# Altium PCB ResistorDecadeBox.PcbDoc
Units mm, origin at the board's own origin, x right, y up, seen from the top; angles counter-clockwise.
Board outline 242.25 x 69.25 mm, 2 copper layers (Top Layer, Bottom Layer); 60 components, 61 nets, 188 pads, 0 vias.
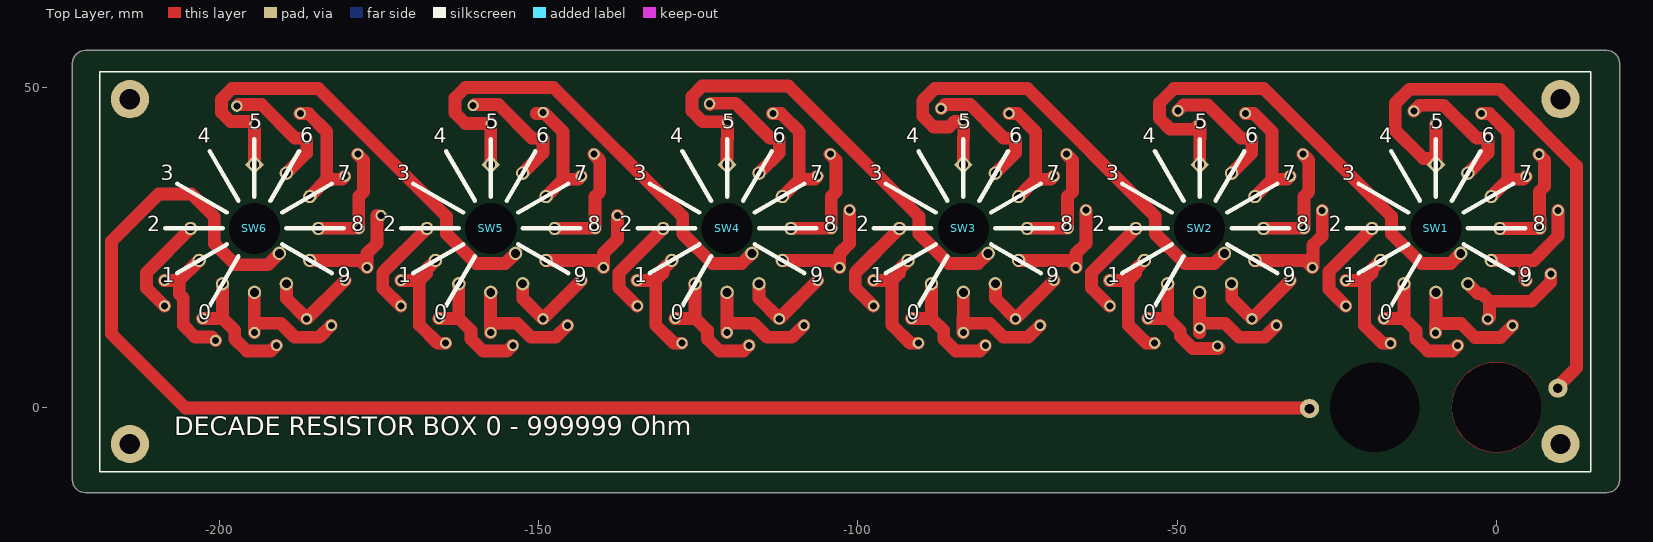
[diagram p0: Top Layer view]
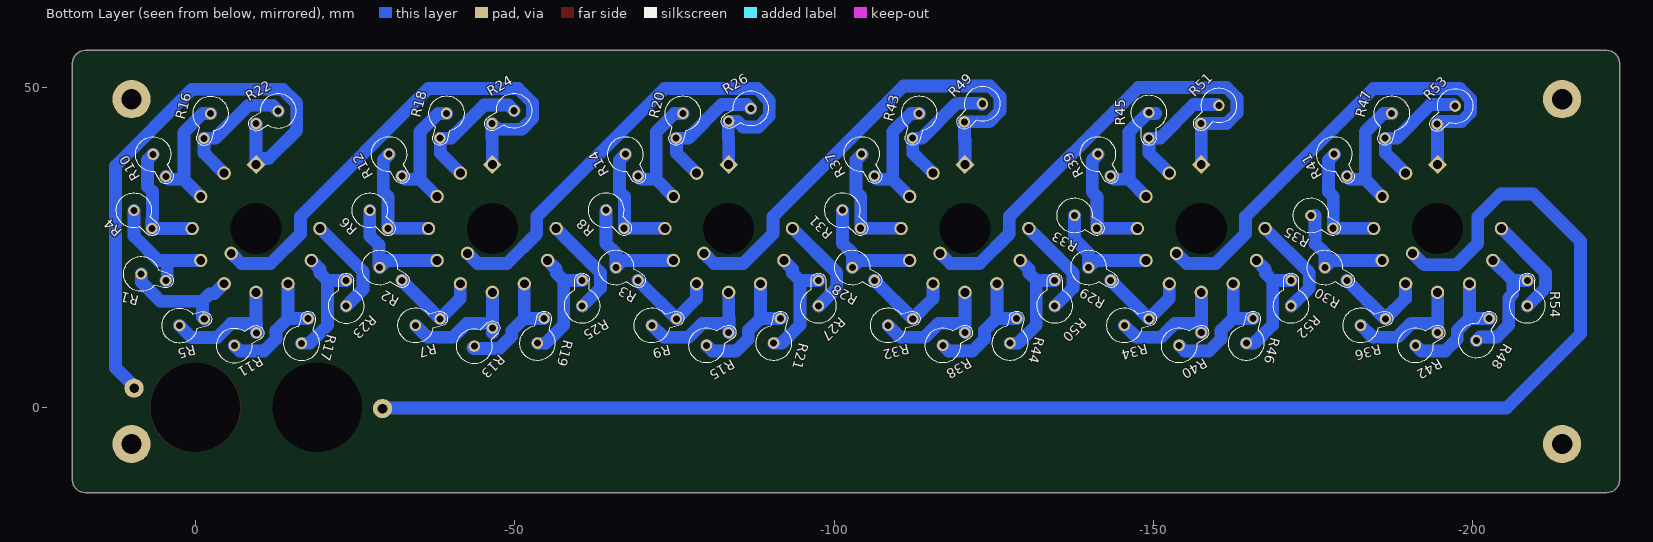
[diagram p1: Bottom Layer view, seen from below]

## Layer stack, top to bottom
Top Solder: solder mask 0.0102, Solder Resist, Dk 3.5
Top Layer: signal copper 0.0356
Dielectric 1: dielectric 0.32, FR-4, Dk 4.8
Bottom Layer: signal copper 0.0356
Bottom Solder: solder mask 0.0102, Solder Resist, Dk 3.5

## Board outline
-222.848,-12.14 -222.663,-12.486 -222.414,-12.789 -222.111,-13.038 -221.765,-13.223 -221.39,-13.337 -221,-13.375 17.25,-13.375 17.64,-13.337 18.015,-13.223 18.361,-13.038 18.664,-12.789 18.913,-12.486 19.098,-12.14 19.212,-11.765 19.25,-11.375 19.25,53.875 19.212,54.265 19.098,54.64 18.913,54.986 18.664,55.289 18.361,55.538 18.015,55.723 17.64,55.837 17.25,55.875 -221,55.875 -221.39,55.837 -221.765,55.723 -222.111,55.538 -222.414,55.289 -222.663,54.986 -222.848,54.64 -222.962,54.265 -223,53.875 -223,-11.375 -222.962,-11.765

## Design rules (kind name [scope] priority, off if disabled: settings)
Clearance [All] p1: gap=0.5 ignorepadtopadclearanceinfootprint=FALSE
PolygonConnect [All] p1: connectstyle=Relief reliefconductorwidth=0.254 reliefentries=4 polygonreliefangle="90 Angle" airgapwidth=0.254
RoutingVias [All] p1: holewidth=0.711 width=1.27 viastyle="Through Hole" minholewidth=0.711 minwidth=1.27 maxholewidth=0.711 maxwidth=1.27
SolderMaskExpansion [All] p1: expansion=0.102 istentingtop=FALSE
Width [All] p1: maxlimit=5 minlimit=0.254 preferedwidth=0.254 minimp=50.000000 maximp=50.000000 favimp=50.000000
30 further rules are at their usual default settings.

## Components (designator, comment, footprint, x,y, rotation, side; value= is the part's Value field where it differs from the comment)
R1 "GENERIC-RES" RES-YAGEO-FMP300-VERT 8.482,20.884 r195 bottom
R2 "GENERIC-RES" RES-YAGEO-FMP300-VERT -28.857,21.884 r210 bottom
R3 "GENERIC-RES" RES-YAGEO-FMP300-VERT -65.857,21.884 r210 bottom
R4 "GENERIC-RES" RES-YAGEO-FMP300-VERT 9.63,30.828 r225 bottom
R5 "GENERIC-RES" RES-YAGEO-FMP300-VERT 2.477,12.791 r165 bottom
R6 "GENERIC-RES" RES-YAGEO-FMP300-VERT -27.309,30.828 r225 bottom
R7 "GENERIC-RES" RES-YAGEO-FMP300-VERT -34.462,12.826 r165 bottom
R8 "GENERIC-RES" RES-YAGEO-FMP300-VERT -64.309,30.863 r225 bottom
R9 "GENERIC-RES" RES-YAGEO-FMP300-VERT -71.462,12.826 r165 bottom
R10 "GENERIC-RES" RES-YAGEO-FMP300-VERT 6.618,39.615 r240 bottom
R11 "GENERIC-RES" RES-YAGEO-FMP300-VERT -6.097,9.665 r150 bottom
R12 "GENERIC-RES" RES-YAGEO-FMP300-VERT -30.321,39.65 r240 bottom
R13 "GENERIC-RES" RES-YAGEO-FMP300-VERT -43.672,9.572 r135 bottom
R14 "GENERIC-RES" RES-YAGEO-FMP300-VERT -67.321,39.65 r240 bottom
R15 "GENERIC-RES" RES-YAGEO-FMP300-VERT -80.036,9.7 r150 bottom
R16 "GENERIC-RES" RES-YAGEO-FMP300-VERT -2.384,45.982 r285 bottom
R17 "GENERIC-RES" RES-YAGEO-FMP300-VERT -16.616,10.018 r105 bottom
R18 "GENERIC-RES" RES-YAGEO-FMP300-VERT -39.324,46.017 r285 bottom
R19 "GENERIC-RES" RES-YAGEO-FMP300-VERT -53.555,10.053 r105 bottom
R20 "GENERIC-RES" RES-YAGEO-FMP300-VERT -76.324,46.017 r285 bottom
R21 "GENERIC-RES" RES-YAGEO-FMP300-VERT -90.555,10.053 r105 bottom
R22 "GENERIC-RES" RES-YAGEO-FMP300-VERT -12.964,46.4 r330 bottom
R23 "GENERIC-RES" RES-YAGEO-FMP300-VERT -23.618,15.849 r90 bottom
R24 "GENERIC-RES" RES-YAGEO-FMP300-VERT -49.903,46.435 r330 bottom
R25 "GENERIC-RES" RES-YAGEO-FMP300-VERT -60.557,15.884 r90 bottom
R26 "GENERIC-RES" RES-YAGEO-FMP300-VERT -86.964,46.8 r330 bottom
R27 "GENERIC-RES" RES-YAGEO-FMP300-VERT -97.557,15.884 r90 bottom
R28 "GENERIC-RES" RES-YAGEO-FMP300-VERT -102.857,21.884 r210 bottom
R29 "GENERIC-RES" RES-YAGEO-FMP300-VERT -139.857,21.884 r210 bottom
R30 "GENERIC-RES" RES-YAGEO-FMP300-VERT -176.857,21.884 r210 bottom
R31 "GENERIC-RES" RES-YAGEO-FMP300-VERT -101.309,30.863 r225 bottom
R32 "GENERIC-RES" RES-YAGEO-FMP300-VERT -108.462,12.826 r165 bottom
R33 "GENERIC-RES" RES-YAGEO-FMP300-VERT -137.673,30.035 r210 bottom
R34 "GENERIC-RES" RES-YAGEO-FMP300-VERT -145.463,12.826 r165 bottom
R35 "GENERIC-RES" RES-YAGEO-FMP300-VERT -174.673,30.035 r210 bottom
R36 "GENERIC-RES" RES-YAGEO-FMP300-VERT -182.462,12.826 r165 bottom
R37 "GENERIC-RES" RES-YAGEO-FMP300-VERT -104.321,39.65 r240 bottom
R38 "GENERIC-RES" RES-YAGEO-FMP300-VERT -117.036,9.7 r150 bottom
R39 "GENERIC-RES" RES-YAGEO-FMP300-VERT -141.321,39.65 r240 bottom
R40 "GENERIC-RES" RES-YAGEO-FMP300-VERT -154.036,9.7 r150 bottom
R41 "GENERIC-RES" RES-YAGEO-FMP300-VERT -178.321,39.65 r240 bottom
R42 "GENERIC-RES" RES-YAGEO-FMP300-VERT -191.036,9.7 r150 bottom
R43 "GENERIC-RES" RES-YAGEO-FMP300-VERT -113.324,46.017 r285 bottom
R44 "GENERIC-RES" RES-YAGEO-FMP300-VERT -127.555,10.053 r105 bottom
R45 "GENERIC-RES" RES-YAGEO-FMP300-VERT -149.288,46.153 r270 bottom
R46 "GENERIC-RES" RES-YAGEO-FMP300-VERT -164.555,10.053 r105 bottom
R47 "GENERIC-RES" RES-YAGEO-FMP300-VERT -187.324,46.017 r285 bottom
R48 "GENERIC-RES" RES-YAGEO-FMP300-VERT -200.59,10.453 r120 bottom
R49 "GENERIC-RES" RES-YAGEO-FMP300-VERT -123.228,47.528 r315 bottom
R50 "GENERIC-RES" RES-YAGEO-FMP300-VERT -134.557,15.884 r90 bottom
R51 "GENERIC-RES" RES-YAGEO-FMP300-VERT -160.268,47.263 r315 bottom
R52 "GENERIC-RES" RES-YAGEO-FMP300-VERT -171.557,15.884 r90 bottom
R53 "GENERIC-RES" RES-YAGEO-FMP300-VERT -197.268,47.165 r315 bottom
R54 "GENERIC-RES" RES-YAGEO-FMP300-VERT -208.557,15.884 r90 bottom
SW1 "SWITCH-ROTARY-1X10" SWITCH-ALPHA-SR2513F-0110 -9.5,28 r225 top locked
SW2 "SWITCH-ROTARY-1X10" SWITCH-ALPHA-SR2513F-0110 -46.5,28 r225 top locked
SW3 "SWITCH-ROTARY-1X10" SWITCH-ALPHA-SR2513F-0110 -83.5,28 r225 top locked
SW4 "SWITCH-ROTARY-1X10" SWITCH-ALPHA-SR2513F-0110 -120.5,28 r225 top locked
SW5 "SWITCH-ROTARY-1X10" SWITCH-ALPHA-SR2513F-0110 -157.5,28 r225 top locked
SW6 "SWITCH-ROTARY-1X10" SWITCH-ALPHA-SR2513F-0110 -194.5,28 r225 top locked

## Footprints (in the part's own frame and the unit in brackets; to place one, negate y for a bottom-side part, rotate by r counter-clockwise, add the part's x,y. Pads: shape width x height; smd on the part's side, far side on the other; paste and mask are expansions set on the pad)
RES-YAGEO-FMP300-VERT [mm] "YAGEO FMP300, 3W, 4mm Pitch, 6mm Body Dia, VERTICAL"
  round 1.8 hole 1.1 paste-2539.97 mask-1: 1(0,0) 2(4,0)
  silkscreen extent -2.75,-2.75 5.15,2.75, body extent -2.75,-2.74 2.75,2.74, height 18.51
SWITCH-ALPHA-SR2513F-0110 [mm]
  rect 2.1x2.1 hole 1.4: 1(-7.071,-7.071)
  round 2.1 hole 1.4: 2(-9.659,-2.588) 3(-9.659,2.588) 4(-7.071,7.071) 5(-2.588,9.659) 6(2.588,9.659) 7(7.071,7.071) 8(9.659,2.588) 9(9.659,-2.588) 10(7.071,-7.071) C(0,5.5)
  round 0 hole 8 unplated paste-2539.97 mask-1: ME1(0,0)

## Free pads (board coordinates)
  round 6 hole 3.2 paste-2539.97 mask-1: 11(-214,48.25) 12(-214,-5.75) 13(10,48.25) 14(10,-5.75)
  round 3 hole 1.5 paste-2539.97 mask-1: 15(9.6,3) 16(-29.3,-0.2)
  round 0 hole 14 paste-2539.97 mask-1: ME1(0,0) ME2(-19.05,0)

## Nets (pads, with @x,y where several pads share a name; then routed paths per layer and width w, separated by ;. In a path a pad name is that pad's centre, name@x,y a point inside that pad or via, vN(x,y) a via of type N, cw(c..) or ccw(c..) an arc to the next point about the centre after c; other vN are vias at no path point)
NetJ1_1: pad.15 R22.2 SW1.1
NetJ2_1: pad.16 SW6.C
NetR1_1: R1.1 R5.2 SW1.6
NetR1_2: R1.2 R4.1 SW1.5
NetR2_1: R2.1 R6.1 SW2.5
NetR2_2: R2.2 R7.2 SW2.6
NetR3_1: R3.1 R8.1 SW3.5
NetR3_2: R3.2 R9.2 SW3.6
NetR4_2: R4.2 R10.1 SW1.4
NetR5_1: R5.1 R11.2 SW1.7
NetR6_2: R6.2 R12.1 SW2.4
NetR7_1: R7.1 R13.2 SW2.7
NetR8_2: R8.2 R14.1 SW3.4
NetR9_1: R9.1 R15.2 SW3.7
NetR10_2: R10.2 R16.1 SW1.3
NetR11_1: R11.1 R17.2 SW1.8
NetR12_2: R12.2 R18.1 SW2.3
NetR13_1: R13.1 R19.2 SW2.8
NetR14_2: R14.2 R20.1 SW3.3
NetR15_1: R15.1 R21.2 SW3.8
NetR16_2: R16.2 R22.1 SW1.2
NetR17_1: R17.1 R23.2 SW1.9
NetR18_2: R18.2 R24.1 SW2.2
NetR19_1: R19.1 R25.2 SW2.9
NetR20_2: R20.2 R26.1 SW3.2
NetR21_1: R21.1 R27.2 SW3.9
NetR23_1: R23.1 SW1.10
NetR24_2: R24.2 SW1.C SW2.1
NetR25_1: R25.1 SW2.10
NetR26_2: R26.2 SW2.C SW3.1
NetR27_1: R27.1 SW3.10
NetR28_1: R28.1 R31.1 SW4.5
NetR28_2: R28.2 R32.2 SW4.6
NetR29_1: R29.1 R33.1 SW5.5
NetR29_2: R29.2 R34.2 SW5.6
NetR30_1: R30.1 R35.1 SW6.5
NetR30_2: R30.2 R36.2 SW6.6
NetR31_2: R31.2 R37.1 SW4.4
NetR32_1: R32.1 R38.2 SW4.7
NetR33_2: R33.2 R39.1 SW5.4
NetR34_1: R34.1 R40.2 SW5.7
NetR35_2: R35.2 R41.1 SW6.4
NetR36_1: R36.1 R42.2 SW6.7
NetR37_2: R37.2 R43.1 SW4.3
NetR38_1: R38.1 R44.2 SW4.8
NetR39_2: R39.2 R45.1 SW5.3
NetR40_1: R40.1 R46.2 SW5.8
NetR41_2: R41.2 R47.1 SW6.3
NetR42_1: R42.1 R48.2 SW6.8
NetR43_2: R43.2 R49.1 SW4.2
NetR44_1: R44.1 R50.2 SW4.9
NetR45_2: R45.2 R51.1 SW5.2
NetR46_1: R46.1 R52.2 SW5.9
NetR47_2: R47.2 R53.1 SW6.2
NetR48_1: R48.1 R54.2 SW6.9
NetR49_2: R49.2 SW3.C SW4.1
NetR50_1: R50.1 SW4.10
NetR51_2: R51.2 SW4.C SW5.1
NetR52_1: R52.1 SW5.10
NetR53_2: R53.2 SW5.C SW6.1
NetR54_1: R54.1 SW6.10
pads on no net: SW1.ME1 SW2.ME1 SW3.ME1 SW4.ME1 SW5.ME1 SW6.ME1
copper on no net: | length 44
  Top Layer w0.05: 7,0 ccw(c0,0) 7,0

## Other copper
Multi-Layer:
  lines w2 net NetJ1_1: 9.173,2.773 9.173,2.844 12.53,6.201 12.53,37.804 0.534,49.8 -13.665,49.8 -15.864,47.601 -15.864,43.364 -11.45,38.95 -10.52,38.95 -9.571,38 -9.5,38 -9.5,44.4 ; -9.5,44.4 -9.5,44.4
  lines w2 net NetJ2_1: -190.592,24.13 -192.403,22.319 -197.481,22.319 -200.781,25.619 -200.781,29.8 -204.381,33.4 -209.5,33.4 -216.9,26 -216.9,11.5 -205.3,-0.1 -29.8,-0.1
  lines w2 net NetR10_2: -2.384,45.982 -1.112,45.982 1.8,43.07 1.8,35.64 -0.84,33 ; 1.8,35.7 4.167,35.7 4.618,36.151
  lines w2 net NetR11_1: -17.651,13.882 -14.482,13.882 ; -14.5,19.34 -14.5,13.9 -14.482,13.882 ; -6.097,9.665 -6.936,8.826 -10.737,8.826 -12.609,10.699 -12.609,12.009 -14.482,13.882
  lines w2 net NetR12_2: -39.365,46.001 -38.035,46.001 -35.181,43.147 -35.181,35.659 -37.821,33.019 ; -35.181,35.719 -32.814,35.719 -32.363,36.17
  lines w2 net NetR13_1: -54.632,13.901 -51.463,13.901 ; -51.481,19.359 -51.5,19.34 -51.5,13.938 -51.463,13.901 ; -43.431,9.331 -43.578,9.184 -47.577,9.184 -49.52,11.127 -49.52,11.958 -51.463,13.901
  lines w2 net NetR14_2: -76.365,46.001 -75.035,46.001 -72.181,43.147 -72.181,35.659 -74.821,33.019 ; -72.181,35.719 -69.814,35.719 -69.363,36.17
  lines w2 net NetR15_1: -91.632,13.901 -88.463,13.901 ; -88.481,19.359 -88.5,19.34 -88.5,13.938 -88.463,13.901 ; -80.078,9.684 -80.943,8.819 -84.693,8.819 -86.578,10.704 -86.578,12.016 -88.463,13.901
  lines w2 net NetR16_2: -12.964,46.4 -12.064,47.3 -8.299,47.3 -3.117,42.118 -1.349,42.118 -1.349,39.811 -4.5,36.66
  lines w2 net NetR17_1: -23.618,19.849 -20.7,19.849 -19.528,21.021 -19.528,21.605 -18.16,22.973 -18.16,23 ; -20.7,19.34 -20.7,12.83 -17.889,10.018 -16.616,10.018
  lines w2 net NetR18_2: -49.945,46.419 -49.029,47.335 -45.238,47.335 -40.04,42.137 -38.33,42.137 -38.33,39.83 -41.481,36.679
  lines w2 net NetR19_1: -60.599,19.868 -57.681,19.868 -56.509,21.04 -56.509,21.624 -55.141,22.992 -55.141,23.019 ; -57.681,19.359 -57.681,12.907 -54.812,10.038 -53.597,10.038
  lines w2 net NetR1_1: -4.5,19.34 -4.473,19.34 -2.926,17.792 -2.288,17.792 -1.117,16.621 ; -1.387,13.826 -1.117,14.097 -1.117,16.621 ; 8.482,20.884 8.482,19.611 5.491,16.621 -1.117,16.621
  lines w2 net NetR1_2: -0.84,23 5.802,23 9.63,26.828 9.63,30.828 ; 4.4,23 4.4,20.067 4.618,19.849
  lines w2 net NetR20_2: -86.964,46.8 -86.364,47.4 -82.423,47.4 -77.16,42.137 -75.33,42.137 -75.33,39.83 -78.481,36.679
  lines w2 net NetR21_1: -97.599,19.868 -94.681,19.868 -93.509,21.04 -93.509,21.624 -92.141,22.992 -92.141,23.019 ; -94.681,19.359 -94.681,12.907 -91.812,10.038 -90.597,10.038
  lines w2 net NetR23_1: -23.618,15.849 -26.241,18.472 -26.241,21.259 -19.519,27.981
  lines w2 net NetR24_2: -46.5,38 -46.5,42.048 -46.439,42.108 -46.439,44.435 -47.339,43.535 -51.105,43.535 -52.803,45.234 -52.803,47.636 -50.54,49.9 -36.47,49.9 -16.45,29.88 -16.45,27.172 -11.778,22.5 -7.222,22.5 -5.611,24.111
  lines w2 net NetR25_1: -60.599,15.868 -63.426,18.696 -63.426,21.074 -56.5,28
  lines w2 net NetR26_2: -83.5,38 -83.5,42.071 -83.439,42.132 -83.439,44.435 ; -83.5,44.8 -84.863,44.8 -85.763,43.9 -88.165,43.9 -89.864,45.599 -89.864,48.001 -87.965,49.9 -73.47,49.9 -53.45,29.88 -53.45,27.172 -48.778,22.5 -44.222,22.5 -42.592,24.13
  lines w2 net NetR27_1: -97.599,15.868 -100.426,18.696 -100.426,21.074 -93.5,28
  lines w2 net NetR28_1: -111.84,23 -103.973,23 -102.857,21.884 -102.857,24.116 -101.309,25.664 -101.309,30.828
  lines w2 net NetR28_2: -115.5,19.34 -115.481,19.321 -115.481,17.016 -112.326,13.861 -106.321,19.866 -106.321,19.884
  lines w2 net NetR29_1: -148.84,23 -140.973,23 -139.857,21.884 -139.857,24.116 -137.673,26.3 -137.673,30.035
  lines w2 net NetR29_2: -152.5,19.34 -152.481,19.321 -152.481,17.016 -149.326,13.861 -143.321,19.866 -143.321,19.884
  lines w2 net NetR2_1: -37.84,23 -29.973,23 -28.857,21.884 -28.738,22.004 -28.738,25.4 -27.309,26.828 -27.309,30.828
  lines w2 net NetR2_2: -41.5,19.34 -41.481,19.321 -41.481,17.016 -38.326,13.861 -32.321,19.866 -32.321,19.884
  lines w2 net NetR30_1: -185.84,23 -177.973,23 -176.857,21.884 -176.857,24.116 -175.309,25.664 -175.309,30.035
  lines w2 net NetR30_2: -189.5,19.34 -189.481,19.321 -189.481,17.016 -186.326,13.861 -180.321,19.866 -180.321,19.884
  lines w2 net NetR31_2: -110.481,28.019 -104.179,28.019 ; -104.363,39.634 -103.421,38.692 -103.421,33.746 -104.179,32.988 -104.179,28.042
  lines w2 net NetR32_1: -120.542,11.684 -120.542,13.158 ; -120.481,17.992 -120.519,17.954 -120.519,14.123 -120.542,14.1 -120.542,13.158 ; -108.504,12.81 -110.353,10.961 -114.196,10.961 -116.393,13.158 -120.542,13.158
  lines w2 net NetR33_2: -147.481,28.019 -141.179,28.019 ; -141.363,39.634 -140.421,38.693 -140.421,33.746 -141.179,32.988 -141.179,28.042
  lines w2 net NetR34_1: -157.542,11.684 -157.542,13.158 ; -157.481,17.992 -157.519,17.954 -157.519,14.123 -157.542,14.1 -157.542,13.158 ; -145.504,12.81 -147.353,10.961 -151.196,10.961 -153.393,13.158 -157.542,13.158
  lines w2 net NetR35_2: -184.481,28.019 -178.179,28.019 ; -178.363,39.634 -177.421,38.692 -177.421,33.746 -178.179,32.988 -178.179,28.042
  lines w2 net NetR36_1: -194.542,11.684 -194.542,13.158 ; -194.481,17.992 -194.519,17.954 -194.519,14.123 -194.542,14.1 -194.542,13.158 ; -182.504,12.81 -184.353,10.961 -188.196,10.961 -190.393,13.158 -194.542,13.158
  lines w2 net NetR37_2: -113.365,46.001 -112.035,46.001 -109.181,43.147 -109.181,35.659 -111.821,33.019 ; -109.181,35.719 -106.814,35.719 -106.363,36.17
  lines w2 net NetR38_1: -128.632,13.901 -125.463,13.901 ; -125.481,19.359 -125.5,19.34 -125.5,13.938 -125.463,13.901 ; -117.078,9.684 -117.943,8.819 -121.693,8.819 -123.578,10.704 -123.578,12.016 -125.463,13.901
  lines w2 net NetR39_2: -150.365,46.001 -149.035,46.001 -146.181,43.147 -146.181,35.659 -148.821,33.019 ; -146.181,35.719 -143.814,35.719 -143.363,36.17
  lines w2 net NetR3_1: -74.84,23 -66.973,23 -65.857,21.884 -65.857,24.116 -64.309,25.664 -64.309,30.828
  lines w2 net NetR3_2: -78.5,19.34 -78.481,19.321 -78.481,17.016 -75.326,13.861 -69.321,19.866 -69.321,19.884
  lines w2 net NetR40_1: -165.632,13.901 -162.463,13.901 ; -162.481,19.359 -162.5,19.34 -162.5,13.938 -162.463,13.901 ; -154.078,9.684 -154.942,8.819 -158.693,8.819 -160.578,10.704 -160.578,12.016 -162.463,13.901
  lines w2 net NetR41_2: -187.365,46.001 -186.035,46.001 -183.181,43.147 -183.181,35.659 -185.821,33.019 ; -183.181,35.719 -180.814,35.719 -180.363,36.17
  lines w2 net NetR42_1: -202.632,13.901 -199.463,13.901 ; -199.481,19.359 -199.5,19.34 -199.5,13.938 -199.463,13.901 ; -191.078,9.684 -191.943,8.819 -195.693,8.819 -197.578,10.704 -197.578,12.016 -199.463,13.901
  lines w2 net NetR43_2: -123.132,47.432 -122.964,47.6 -119.199,47.6 -113.736,42.137 -112.33,42.137 -112.33,39.83 -115.481,36.679
  lines w2 net NetR44_1: -134.599,19.868 -131.681,19.868 -130.509,21.04 -130.509,21.624 -129.141,22.992 -129.141,23.019 ; -131.681,19.359 -131.681,12.907 -128.812,10.038 -127.597,10.038
  lines w2 net NetR45_2: -159.964,47.4 -156.303,47.4 -151.04,42.137 -149.33,42.137 -149.33,39.83 -152.481,36.679
  lines w2 net NetR46_1: -171.599,19.868 -168.681,19.868 -167.509,21.04 -167.509,21.624 -166.141,22.992 -166.141,23.019 ; -168.681,19.359 -168.681,12.906 -165.812,10.038 -164.597,10.038
  lines w2 net NetR47_2: -196.964,47.4 -193.401,47.4 -188.138,42.137 -186.33,42.137 -186.33,39.83 -189.481,36.679
  lines w2 net NetR48_1: -208.599,19.868 -206.292,19.868 ; -203.141,23.019 -206.292,19.868 ; -200.59,10.453 -201.154,11.017 -203.791,11.017 -205.657,12.883 -205.657,17.085 -206.292,17.72 -206.292,19.868
  lines w2 net NetR49_2: -120.5,38 -120.5,41.885 -120.439,41.946 -120.439,44.435 ; -120.4,44.7 -124.32,44.7 -126,46.38 -126,48.676 -124.376,50.3 -110.87,50.3 -90.45,29.88 -90.45,27.172 -85.778,22.5 -81.222,22.5 -79.592,24.13
  lines w2 net NetR4_2: 0.5,28 0.5,28 6.802,28 6.802,29.556 6.73,29.627 6.73,33.777 7.518,34.565 7.518,38.715 6.618,39.615
  lines w2 net NetR50_1: -134.599,15.868 -137.426,18.696 -137.426,21.074 -130.5,28
  lines w2 net NetR51_2: -157.5,38 -157.5,44.374 ; -157.439,44.435 -161.439,44.435 -163.096,46.092 -163.096,48.435 -161.439,50.092 -147.662,50.092 -127.45,29.88 -127.45,27.172 -122.778,22.5 -118.222,22.5 -116.592,24.13
  lines w2 net NetR52_1: -171.599,15.868 -174.426,18.696 -174.426,21.074 -167.5,28
  lines w2 net NetR53_2: -194.5,38 -194.5,44.4 ; -194.481,38.019 -194.5,38.038 -194.5,44.4 ; -194.439,44.337 -194.86,44.757 -198.265,44.757 -199.676,46.168 -199.676,48.224 -198,49.9 -184.47,49.9 -164.45,29.88 -164.45,27.172 -159.778,22.5 -155.222,22.5 -153.592,24.13 ; -194.5,44.4 -194.481,44.419 -194.5,44.4
  lines w2 net NetR54_1: -208.599,15.868 -211.426,18.696 -211.426,21.074 -204.5,28
  lines w2 net NetR5_1: -9.561,11.665 -9.561,13.139 ; -9.5,18 -9.5,13.2 -9.561,13.139 ; 2.477,12.791 0.612,10.926 -3.368,10.926 -5.581,13.139 -9.561,13.139
  lines w2 net NetR6_2: -36.481,28.019 -30.179,28.019 ; -30.363,39.634 -29.421,38.692 -29.421,33.746 -30.179,32.988 -30.179,28.042
  lines w2 net NetR7_1: -46.542,11.684 -46.542,13.158 ; -46.481,17.992 -46.519,17.954 -46.519,16.009 -46.542,15.987 -46.542,13.158 ; -34.504,12.81 -36.353,10.961 -40.349,10.961 -42.546,13.158 -46.542,13.158
  lines w2 net NetR8_2: -73.481,28.019 -67.179,28.019 ; -67.363,39.634 -66.421,38.693 -66.421,33.746 -67.179,32.988 -67.179,28.042
  lines w2 net NetR9_1: -83.542,11.684 -83.542,13.158 ; -83.481,17.992 -83.519,17.954 -83.519,14.123 -83.542,14.1 -83.542,13.158 ; -71.504,12.81 -73.353,10.961 -77.196,10.961 -79.393,13.158 -83.542,13.158

## Silkscreen, mask and mechanical layers (free items; w line width, h text height)
Top Overlay:
  lines w0.2: -218.75,-10.075 -218.75,52.575 14.75,52.575 14.75,-10.075 -218.75,-10.075
  lines w0.7: -208.5,28 -199.5,28 ; -206.624,21 -198.83,25.5 ; -206.624,35 -198.83,30.5 ; -201.5,15.876 -197,23.67 ; -201.5,40.124 -197,32.33 ; -194.5,33 -194.5,42 ; -192,32.33 -187.5,40.124 ; -190.17,25.5 -182.376,21 ; -190.17,30.5 -182.376,35 ; -189.5,28 -180.5,28 ; -171.5,28 -162.5,28 ; -169.624,21 -161.83,25.5 ; -169.624,35 -161.83,30.5 ; -164.5,15.876 -160,23.67 ; -164.5,40.124 -160,32.33 ; -157.5,33 -157.5,42 ; -155,32.33 -150.5,40.124 ; -153.17,25.5 -145.376,21 ; -153.17,30.5 -145.376,35 ; -152.5,28 -143.5,28 ; -134.5,28 -125.5,28 ; -132.624,21 -124.83,25.5 ; -132.624,35 -124.83,30.5 ; -127.5,15.876 -123,23.67 ; -127.5,40.124 -123,32.33 ; -120.5,33 -120.5,42 ; -118,32.33 -113.5,40.124 ; -116.17,25.5 -108.376,21 ; -116.17,30.5 -108.376,35 ; -115.5,28 -106.5,28 ; -97.5,28 -88.5,28 ; -95.624,21 -87.83,25.5 ; -95.624,35 -87.83,30.5 ; -90.5,15.876 -86,23.67 ; -90.5,40.124 -86,32.33 ; -83.5,33 -83.5,42 ; -81,32.33 -76.5,40.124 ; -79.17,25.5 -71.376,21 ; -79.17,30.5 -71.376,35 ; -78.5,28 -69.5,28 ; -60.5,28 -51.5,28 ; -58.624,21 -50.83,25.5 ; -58.624,35 -50.83,30.5 ; -53.5,15.876 -49,23.67 ; -53.5,40.124 -49,32.33 ; -46.5,33 -46.5,42 ; -44,32.33 -39.5,40.124 ; -42.17,25.5 -34.376,21 ; -42.17,30.5 -34.376,35 ; -41.5,28 -32.5,28 ; -23.5,28 -14.5,28 ; -21.624,21 -13.83,25.5 ; -21.624,35 -13.83,30.5 ; -16.5,15.876 -12,23.67 ; -16.5,40.124 -12,32.33 ; -9.5,33 -9.5,42 ; -7,32.33 -2.5,40.124 ; -5.17,25.5 2.624,21 ; -5.17,30.5 2.624,35 ; -4.5,28 4.5,28
  text "5" at -195.279,42.828 h4
  text "5" at -158.279,42.828 h4
  text "5" at -121.279,42.828 h4
  text "5" at -84.279,42.828 h4
  text "5" at -47.279,42.828 h4
  text "5" at -10.279,42.828 h4
  text "4" at -203.405,40.659 h4
  text "6" at -187.347,40.662 h4
  text "4" at -166.405,40.659 h4
  text "6" at -150.347,40.662 h4
  text "4" at -129.405,40.659 h4
  text "6" at -113.347,40.662 h4
  text "4" at -92.405,40.659 h4
  text "6" at -76.347,40.662 h4
  text "4" at -55.405,40.659 h4
  text "6" at -39.347,40.662 h4
  text "4" at -18.405,40.659 h4
  text "6" at -2.347,40.662 h4
  text "3" at -209.143,34.803 h4
  text "7" at -181.463,34.803 h4
  text "3" at -172.143,34.803 h4
  text "7" at -144.463,34.803 h4
  text "3" at -135.143,34.803 h4
  text "7" at -107.463,34.803 h4
  text "3" at -98.143,34.803 h4
  text "7" at -70.463,34.803 h4
  text "3" at -61.143,34.803 h4
  text "7" at -33.463,34.803 h4
  text "3" at -24.143,34.803 h4
  text "7" at 3.537,34.803 h4
  text "8" at -179.348,26.806 h4
  text "8" at -142.348,26.806 h4
  text "8" at -105.348,26.806 h4
  text "8" at -68.348,26.806 h4
  text "8" at -31.348,26.806 h4
  text "8" at 5.652,26.806 h4
  text "2" at -211.308,26.778 h4
  text "2" at -174.308,26.778 h4
  text "2" at -137.308,26.778 h4
  text "2" at -100.308,26.778 h4
  text "2" at -63.308,26.778 h4
  text "2" at -26.308,26.778 h4
  text "1" at -209.003,18.801 h4
  text "9" at -181.49,18.803 h4
  text "1" at -172.003,18.801 h4
  text "9" at -144.49,18.803 h4
  text "1" at -135.003,18.801 h4
  text "9" at -107.49,18.803 h4
  text "1" at -98.003,18.801 h4
  text "9" at -70.49,18.803 h4
  text "1" at -61.003,18.801 h4
  text "9" at -33.49,18.803 h4
  text "1" at -24.003,18.801 h4
  text "9" at 3.51,18.803 h4
  text "0" at -203.327,12.947 h4
  text "0" at -166.327,12.947 h4
  text "0" at -129.327,12.947 h4
  text "0" at -92.327,12.947 h4
  text "0" at -55.327,12.947 h4
  text "0" at -18.327,12.947 h4
  text "DECADE RESISTOR BOX 0 - 999999 Ohm" at -207.032,-5.425 h5
Top Assembly:
  lines w0.05: -141.137,28.035 -157.439,28.035 ; -141.137,28.035 -157.439,28.035 ; -60.557,19.884 -46.439,28.035 ; -54.59,13.917 -46.439,28.035 ; -46.5,11.7 -46.5,28.002 ; -46.477,27.979 -38.326,13.861 ; -46.439,28.035 -32.321,19.884 ; -46.439,44.435 -46.439,44.337 -46.439,28.035 ; -38.288,42.153 -46.439,28.035 ; -32.321,36.186 -46.439,28.035 ; -30.137,28.035 -46.439,28.035 ; -23.618,19.849 -9.5,28 ; -17.651,13.882 -9.5,28 ; -9.561,11.665 -9.561,27.967 ; -9.538,27.944 -1.387,13.826 ; -9.5,44.4 -9.5,44.302 -9.5,28 ; -1.349,42.118 -9.5,28 ; 4.618,19.849 -9.5,28 ; 4.618,36.151 -9.5,28 ; 6.802,28 -9.5,28 ; -194.439,28.035 -208.557,19.884 -194.439,28.035 ; -194.439,28.035 -202.59,13.917 -194.439,28.035 ; -194.439,28.035 -178.137,28.035 -194.439,28.035 ; -194.439,28.035 -180.321,36.186 -194.439,28.035 ; -194.439,28.035 -186.288,42.153 -194.439,28.035 ; -194.439,28.035 -194.439,44.337 ; -194.439,28.035 -194.439,44.337 ; -194.439,44.337 -194.439,44.435 -194.439,44.337 ; -157.439,28.035 -143.321,19.884 -157.439,28.035 ; -157.439,28.035 -143.321,36.186 -157.439,28.035 ; -157.439,28.035 -171.557,19.884 -157.439,28.035 ; -157.439,28.035 -165.59,13.917 -157.439,28.035 ; -157.439,28.035 -149.288,42.153 -157.439,28.035 ; -157.439,28.035 -157.439,44.337 ; -157.439,28.035 -157.439,44.337 ; -157.439,44.337 -157.439,44.435 -157.439,44.337 ; -120.439,28.035 -134.557,19.884 -120.439,28.035 ; -120.439,28.035 -128.59,13.917 -120.439,28.035 ; -120.439,28.035 -104.137,28.035 -120.439,28.035 ; -120.439,28.035 -106.321,36.186 -120.439,28.035 ; -120.439,28.035 -112.288,42.153 -120.439,28.035 ; -120.439,28.035 -120.439,44.337 ; -120.439,28.035 -120.439,44.337 ; -120.439,44.337 -120.439,44.435 -120.439,44.337 ; -83.439,28.035 -97.557,19.884 -83.439,28.035 ; -83.439,28.035 -91.59,13.917 -83.439,28.035 ; -83.439,28.035 -67.137,28.035 -83.439,28.035 ; -83.439,28.035 -69.321,36.186 -83.439,28.035 ; -83.439,28.035 -75.288,42.153 -83.439,28.035 ; -83.439,28.035 -83.439,44.337 ; -83.439,28.035 -83.439,44.337 ; -83.439,44.337 -83.439,44.435 -83.439,44.337 ; -194.5,11.7 -194.5,28.002 -194.5,11.7 ; -194.477,27.979 -186.326,13.861 -194.477,27.979 ; -194.439,28.035 -180.321,19.884 -194.439,28.035 ; -157.5,11.7 -157.5,28.002 -157.5,11.7 ; -157.477,27.979 -149.326,13.861 -157.477,27.979 ; -120.5,11.7 -120.5,28.002 -120.5,11.7 ; -120.477,27.979 -112.326,13.861 -120.477,27.979 ; -120.439,28.035 -106.321,19.884 -120.439,28.035 ; -83.5,11.7 -83.5,28.002 -83.5,11.7 ; -83.477,27.979 -75.326,13.861 -83.477,27.979 ; -83.439,28.035 -69.321,19.884 -83.439,28.035
CONTOUR (Mech22):
  lines w0.05: -103.4,21.25 -102,21.25 ; -102,19.85 -102,21.25 ; -102,22.65 -102,21.25 ; -100.6,21.25 -102,21.25 ; -0.936,-3.476 ccw(c0,-3) 0.936,-3.476 ccw(c0,0) -0.936,-3.476
  lines w0.1: -223,-11.375 -222.962,-11.765 -222.848,-12.14 -222.663,-12.486 -222.414,-12.789 -222.111,-13.038 -221.765,-13.223 -221.39,-13.337 -221,-13.375 17.25,-13.375 17.64,-13.337 18.015,-13.223 18.361,-13.038 18.664,-12.789 18.913,-12.486 19.098,-12.14 19.212,-11.765 19.25,-11.375 19.25,53.875 19.212,54.265 19.098,54.64 18.913,54.986 18.664,55.289 18.361,55.538 18.015,55.723 17.64,55.837 17.25,55.875 -221,55.875 -221.39,55.837 -221.765,55.723 -222.111,55.538 -222.414,55.289 -222.663,54.986 -222.848,54.64 -222.962,54.265 -223,53.875 -223,-11.375
  text "BORDER" at -112.266,53.564 h3
  text "BORDER" at 18.137,19.076 h3 r90
  text "BORDER" at -220.496,18.441 h3 r90
  text "BORDER" at -110.361,-12.349 h3